# Altium PCB WDpcb1u20180124.PcbDoc
Units mm, origin at the board's own origin, x right, y up, seen from the top; angles counter-clockwise.
Board outline 85.1 x 72.58 mm, 2 copper layers (Top Layer, Bottom Layer); 25 components, 22 nets, 87 pads, 250 vias.
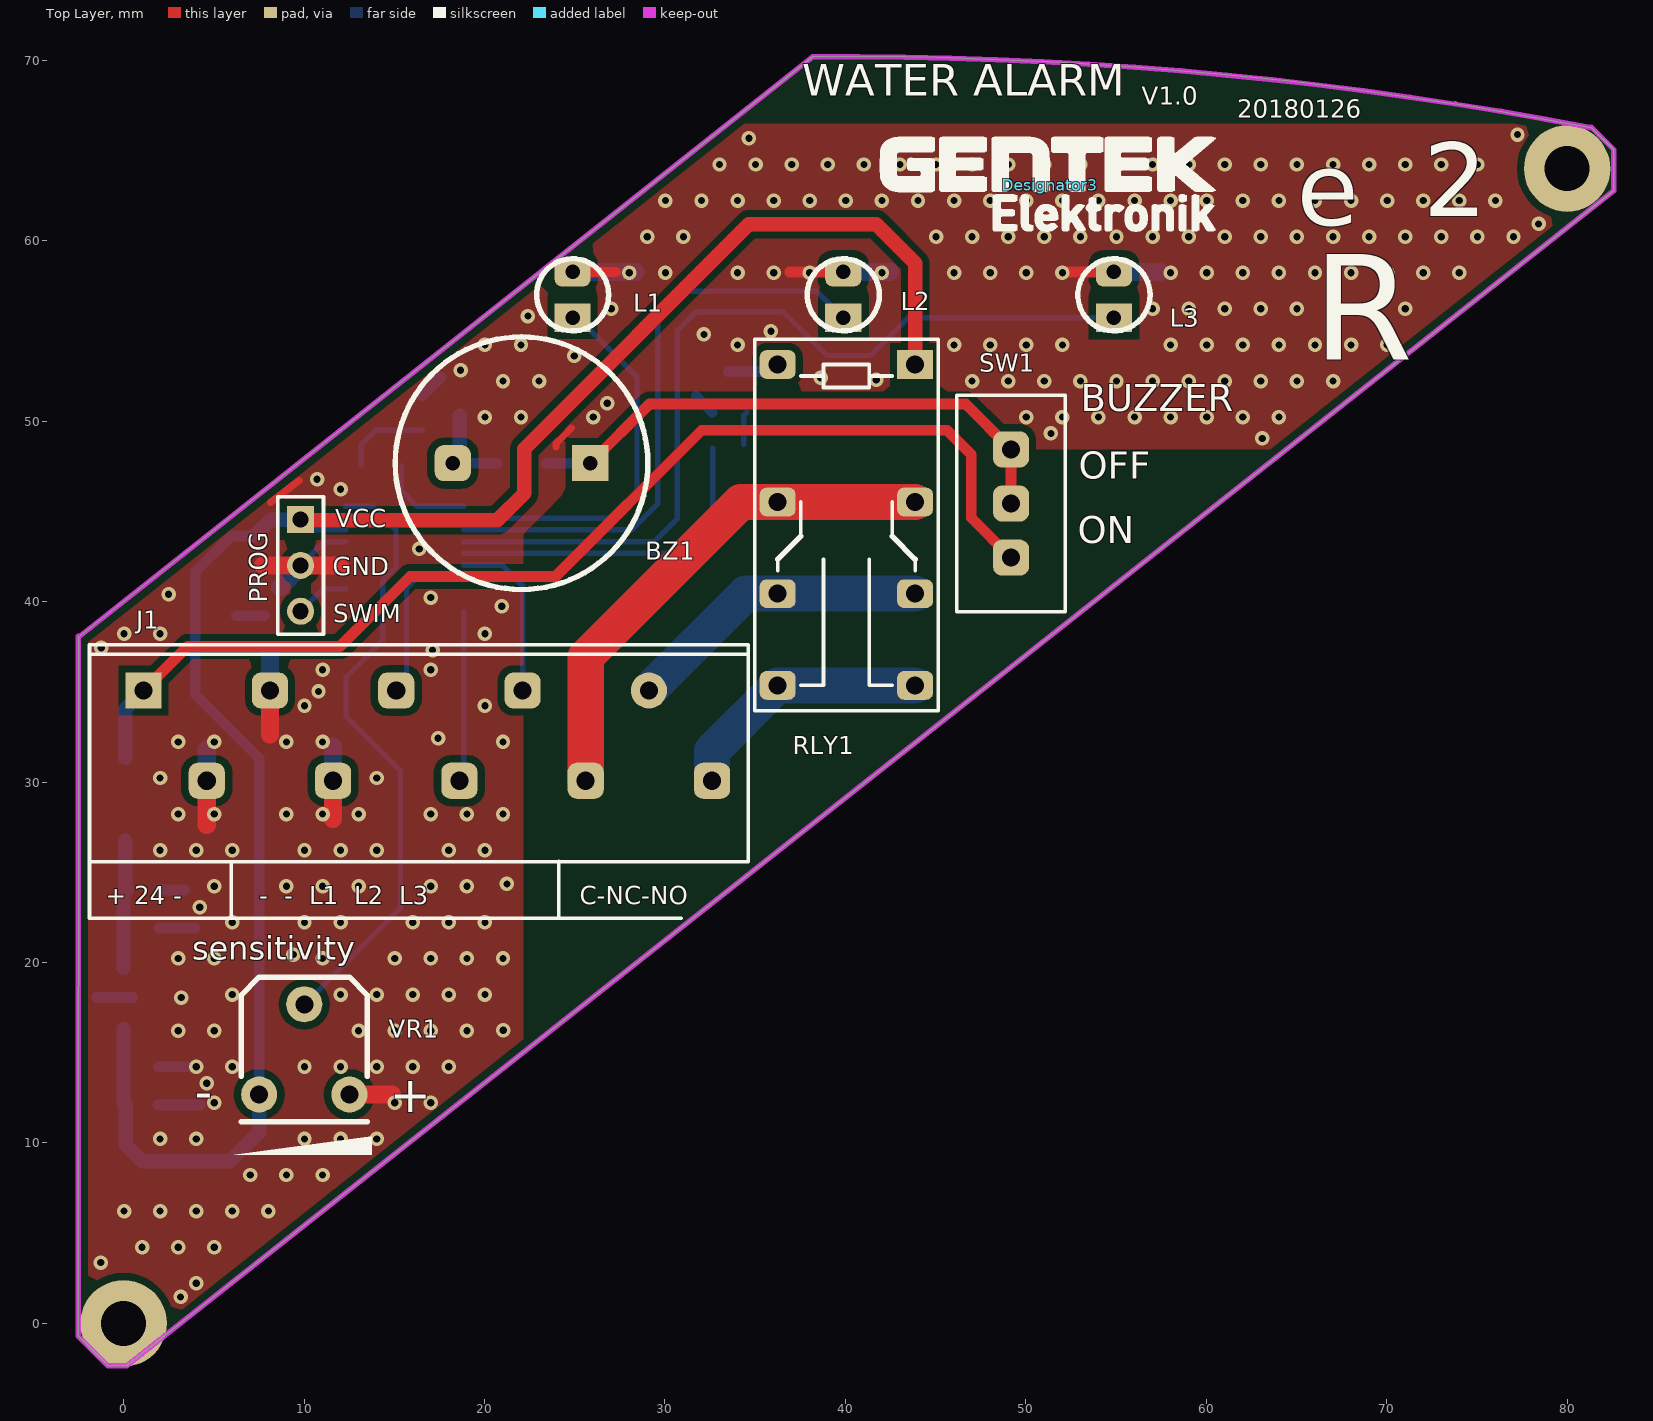
[diagram p0: Top Layer view]
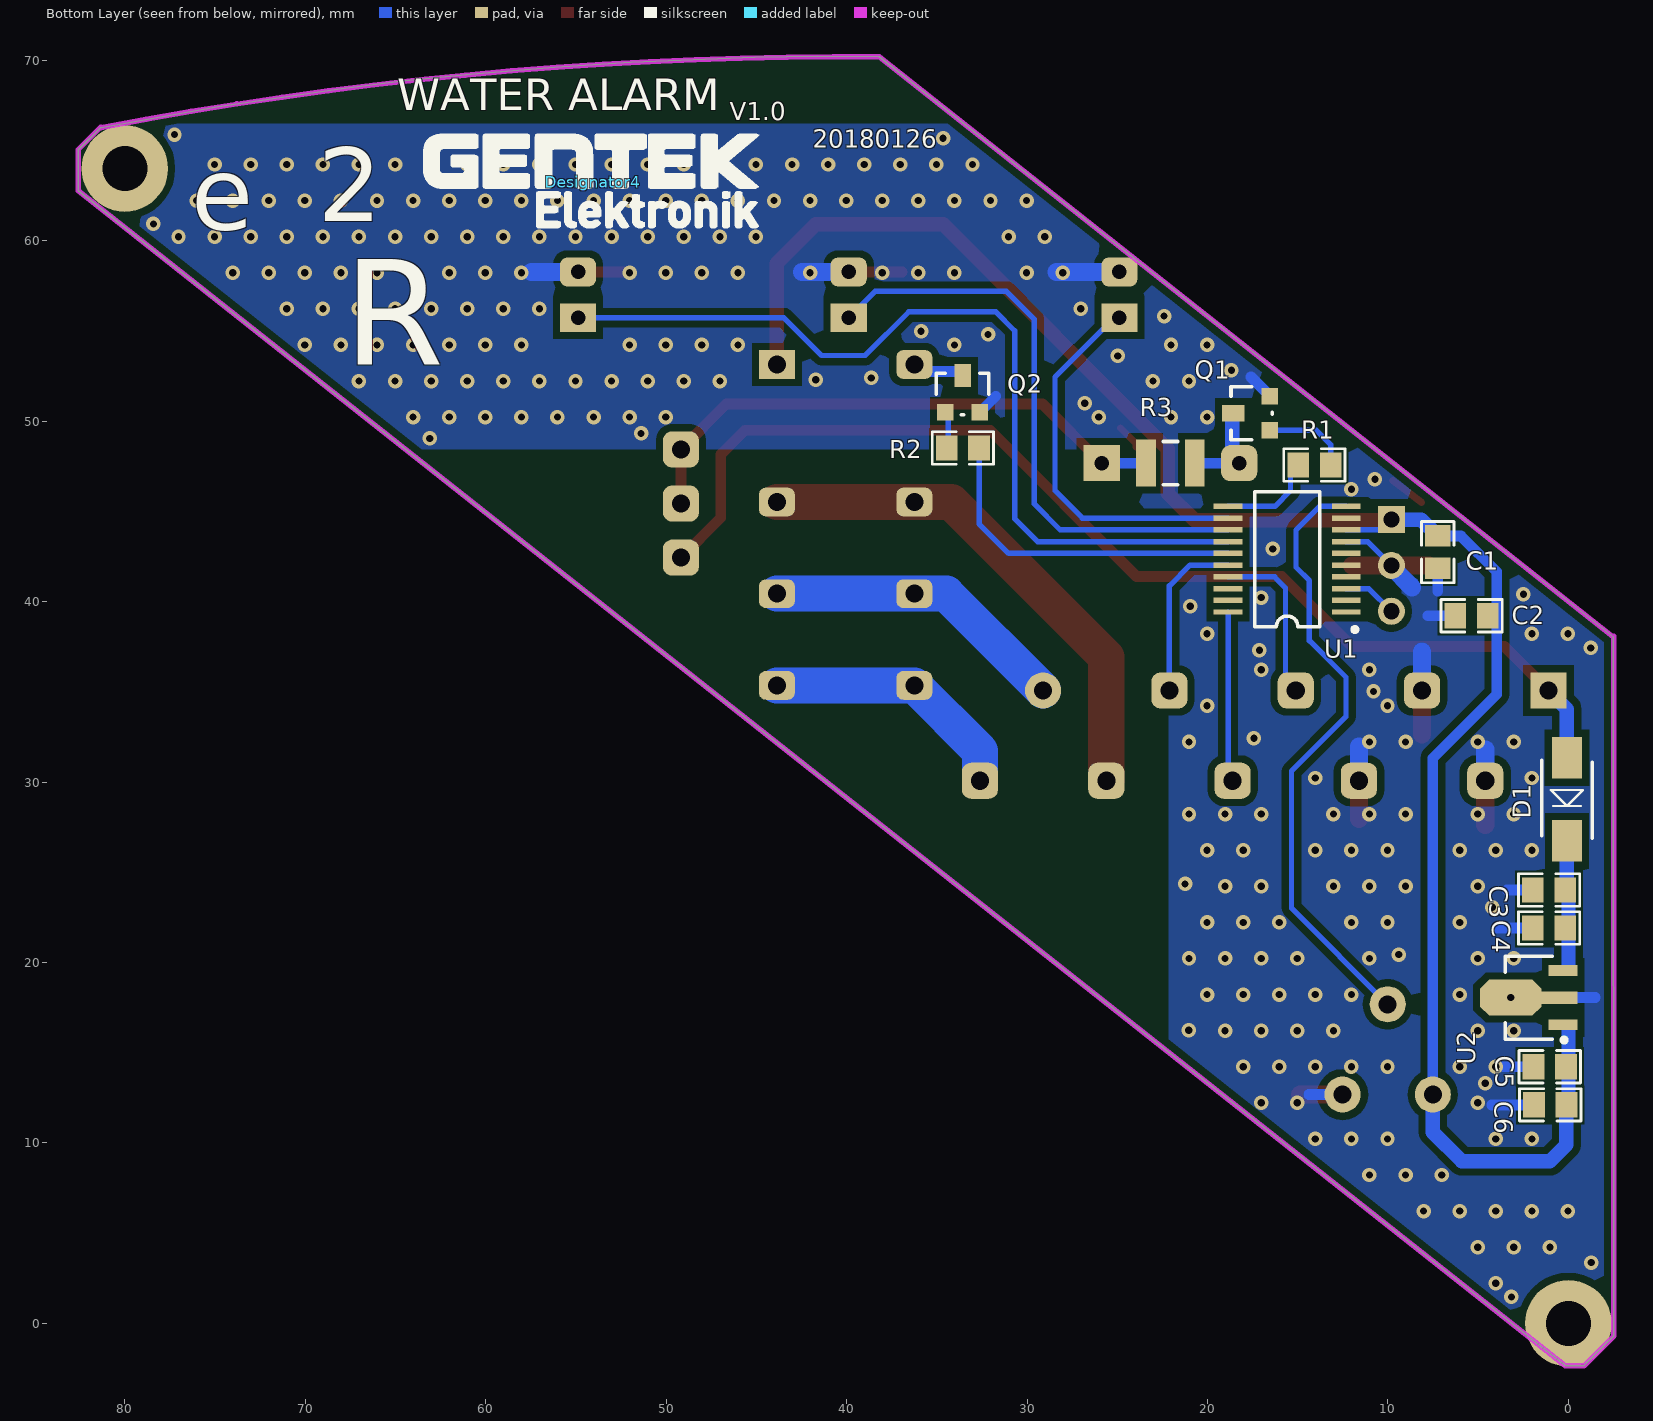
[diagram p1: Bottom Layer view, seen from below]

## Layer stack, top to bottom
Top Solder: solder mask 0.0102, Solder Resist, Dk 3.5
Top Layer: signal copper 0.0356
Dielectric 1: dielectric 0.32, FR-4, Dk 4.8
Bottom Layer: signal copper 0.0356
Bottom Solder: solder mask 0.0102, Solder Resist, Dk 3.5

## Board outline
-2.517,-0.692 -0.854,-2.355 0.165,-2.355 82.583,62.773 82.583,65.041 81.332,66.266 74.833,67.431 68.001,68.422 64.496,68.853 60.813,69.234 56.164,69.615 51.923,69.895 45.09,70.174 41.61,70.225 38.189,70.193 -2.494,38.04 -2.517,-0.692

## Design rules (kind name [scope] priority, off if disabled: settings)
Clearance [All] p1: gap=0.4 ignorepadtopadclearanceinfootprint=FALSE
DiffPairsRouting [All] p1: maxlimit=0.254 minlimit=0.254 mostfreqgap=0.254 toplayer_minwidth=0.381 toplayer_maxwidth=0.381 toplayer_prefwidth=0.381 bottomlayer_minwidth=0.381 bottomlayer_maxwidth=0.381 bottomlayer_prefwidth=0.381 substack1={59E6C3D2-A5CD-4B9F-BAEB-467B5BD1E1AA} toplayer_{59e6c3d2-a5cd-4b9f-baeb-467b5bd1e1aa}_minwidth=0.381 toplayer_{59e6c3d2-a5cd-4b9f-baeb-467b5bd1e1aa}_maxwidth=0.381 toplayer_{59e6c3d2-a5cd-4b9f-baeb-467b5bd1e1aa}_prefwidth=0.381 bottomlayer_{59e6c3d2-a5cd-4b9f-baeb-467b5bd1e1aa}_minwidth=0.381 bottomlayer_{59e6c3d2-a5cd-4b9f-baeb-467b5bd1e1aa}_maxwidth=0.381 bottomlayer_{59e6c3d2-a5cd-4b9f-baeb-467b5bd1e1aa}_prefwidth=0.381 substack2={6E349AA3-A2AC-46F5-B1A9-C29AA8AD77F6} toplayer_{6e349aa3-a2ac-46f5-b1a9-c29aa8ad77f6}_minwidth=0.381 toplayer_{6e349aa3-a2ac-46f5-b1a9-c29aa8ad77f6}_maxwidth=0.381 toplayer_{6e349aa3-a2ac-46f5-b1a9-c29aa8ad77f6}_prefwidth=0.381 bottomlayer_{6e349aa3-a2ac-46f5-b1a9-c29aa8ad77f6}_minwidth=0.381 bottomlayer_{6e349aa3-a2ac-46f5-b1a9-c29aa8ad77f6}_maxwidth=0.381 bottomlayer_{6e349aa3-a2ac-46f5-b1a9-c29aa8ad77f6}_prefwidth=0.381 maxuncoupledlength=12.7
PolygonConnect [All] p1: connectstyle=Relief reliefconductorwidth=0.254 reliefentries=4 polygonreliefangle="90 Angle" airgapwidth=0.254
RoutingVias [All] p1: holewidth=0.711 width=1.27 viastyle="Through Hole" minholewidth=0.711 minwidth=1.27 maxholewidth=0.711 maxwidth=1.27
SolderMaskExpansion [All] p1: expansion=0.102 istentingtop=FALSE
Width [All] p1: maxlimit=0.254 minlimit=0.254 preferedwidth=0.254 substack1={59E6C3D2-A5CD-4B9F-BAEB-467B5BD1E1AA} substack2={6E349AA3-A2AC-46F5-B1A9-C29AA8AD77F6}
29 further rules are at their usual default settings.

## Components (designator, comment, footprint, x,y, rotation, side; value= is the part's Value field where it differs from the comment)
BZ1 "Comment" "piezo buzzer" 22.052,47.67 r90 top
C1 "CAP110050456E" C0805-N 7.244,42.742 r270 bottom (schematic designator C55)
C2 "CAP110050456E" C0805-N 5.364,39.212 r0 bottom (schematic designator C55)
C3 "CAP110050456E" C0805-N 1.068,24.022 r180 bottom (schematic designator C55)
C4 "CAP110050456E" C0805-N 1.068,21.914 r180 bottom (schematic designator C55)
C5 "CAP110050456E" C0805-N 1.032,14.218 r180 bottom (schematic designator C55)
C6 "CAP110050456E" C0805-N 1.007,12.11 r180 bottom (schematic designator C55)
D1 "SMAJ33CA" DO-214AC(SMA) 0.081,29.052 r270 bottom (schematic designator D7)
Designator3 "Comment" "GENTRK ELEKTRONIK" 51.338,63.113 r0 top
Designator4 "Comment" "GENTRK ELEKTRONIK" 54.031,63.265 r180 bottom
J1 "Comment" "10 pin Terminal sping loaded" 1.108,35.073 r0 top
L1 "Comment" "led 3mm" 24.883,56.998 r270 top
L2 "Comment" "led 3mm" 39.883,56.998 r270 top
L3 "Comment" "led 3mm" 54.883,56.998 r270 top
PROG "Comment" HDR1X3 9.809,44.546 r270 top
Q1 "TRS0BC817001" SOT-23 17.556,50.438 r90 bottom (schematic designator Q3)
Q2 "TRS0BC817001" SOT-23 33.578,51.505 r180 bottom (schematic designator Q3)
R1 "CAP110050319E" C0805-N 14.077,47.568 r180 bottom (schematic designator C54)
R2 "CAP110050319E" C0805-N 33.558,48.508 r0 bottom (schematic designator C54)
R3 "Comment" C1210 22.052,47.67 r0 bottom
RLY1 "Comment" "relay 5v tetecom" 40.058,44.248 r180 top
SW1 "Comment" "Slide Switch" 49.179,45.435 r90 top
U1 "Comment" TSSOP20 12.308,39.423 r90 bottom
U2 "Comment" SOT89M 2.189,18.053 r0 bottom
VR1 "Comment" Potentiometer 10.013,15.183 r0 top

## Footprints (in the part's own frame and the unit in brackets; to place one, negate y for a bottom-side part, rotate by r counter-clockwise, add the part's x,y. Pads: shape width x height; smd on the part's side, far side on the other; paste and mask are expansions set on the pad)
"10 pin Terminal sping loaded" [mm] "degson"
  rect 2x2 hole 1: 1(0,0)
  rrect50% 2x2 hole 1: 2(3.5,-5) 3(7,0) 4(10.5,-5) 5(14,0) 6(17.5,-5) 7(21,0) 8(24.5,-5) 10(31.5,-5)
  round 2 hole 1: 9(28,0)
  silkscreen extent -3,-9.5 33.5,2.54
C0805-N [mm] "Chip Resistor, Body 2.0x1.3mm, IPC Medium Density"
  rect 1.2x1.4 smd: 1(-0.9,0) 2(0.9,0)
  silkscreen extent -1.7,-0.9 1.7,0.9, body extent -1.07,-0.7 1.07,0.7, height 1.55
C1210 [mm] "Chip Capacitor, Body 3.2x2.5mm, IPC High Density"
  rect 1.1x2.6 smd: 1(-1.35,0) 2(1.35,0)
  silkscreen extent -0.4,-1.2 0.4,1.2, body extent -1.7,-1.35 1.7,1.35, height 1.3
DO-214AC(SMA) [mm]
  rect 2.3x1.68 smd: A(-2.3,0) K(2.3,0)
  silkscreen extent -2.16,-1.4 2.16,1.4
"GENTRK ELEKTRONIK" [mm]
  silkscreen extent -9.43,-2.58 9.2,2.64, body extent -9.43,-2.59 9.2,2.65, height 3
HDR1X3 [mm] "Connector; Header; 3 Position"
  rect 1.5x1.5 hole 0.9: 1(0,0)
  round 1.5 hole 0.9: 2(2.54,0) 3(5.08,0)
  silkscreen extent -1.27,-1.27 6.35,1.27
"led 3mm" [mm]
  rrect50% 1.6x2 hole 0.8: 1(-1.27,0)
  rect 1.6x2 hole 0.8: 2(1.27,0)
  silkscreen extent -2,-2 2,2
"piezo buzzer" [mm]
  rect 2x2 hole 0.8: 1(0,-3.81)
  rrect50% 2x2 hole 0.8: 2(0,3.81)
  silkscreen extent -7,-7 7,7
Potentiometer [mm]
  round 2 hole 1: 1(-2.5,-2.5) 2(2.5,-2.5) 3(0,2.5)
  silkscreen extent -3.5,-4 3.5,4
"relay 5v tetecom" [mm]
  rrect50% 2x1.6 hole 1: 1(3.81,-8.89) 4(3.81,-1.27) 6(3.81,3.81) 8(3.81,8.89) 9(-3.81,8.89) 11(-3.81,3.81) 13(-3.81,-1.27)
  rect 2x1.6 hole 1: 16(-3.81,-8.89)
  silkscreen extent -5.08,-10.3 5.08,10.3
"Slide Switch" [mm]
  rrect50% 2x2 hole 1: 1(-3,0) 2(0,0) 3(3,0)
  silkscreen extent -6,-3 6,3
SOT89M [mm] "SOT89, 3-Leads, Body 4.5x2.4 mm, Pitch 1.5mm, Lead Span 4.1mm, IPC Low Density"
  rect 1.6x0.6 smd: 1(-1.9,1.5) 3(-1.9,-1.5)
  rect 2x0.7 smd: 2(-1.7,0)
  oct 3.4x2 smd: 2(1,0)
  silkscreen extent -2.07,-2.3 1.3,2.47, body extent -1.3,-2.3 1.3,2.3, height 1.6
SOT-23 [mil]
  rect 36x36 smd: 1(-37.5,-40) 2(37.5,-40)
  rect 36x50 smd: 3(0.5,40)
  silkscreen extent -58,-45 58,45, body extent -60,-48 60,48, height 43
TSSOP20 [mm] "SO20 - 20 Leads; Body Width 7.5 mm; Pitch 1.27 mm"
  rect 0.3x1.6 smd: GND(3.9,0) NRST(1.95,0) PA2(2.6,0) PA3(3.25,0) PB0(5.85,0) PB1(5.85,6.55) PB2(5.2,6.55) PB3(4.55,6.55) PB4(3.9,6.55) PB5(3.25,6.55) PB6(2.6,6.55) PB7(1.95,6.55) PC4(0,6.55) PC5(0,0) PC6(0.65,0) PD0(5.2,0) SCL(0.65,6.55) SDA(1.3,6.55) SWIM(1.3,0) VCC(4.55,0)
  silkscreen extent -1.1,-0.6 6.67,5.07, body extent -0.39,0 6.2,6.5, height 1.4

## Part data
C1 C2 C3 C4 C5 C6: "CAP.0805 10uF 16V 10% X5R SAMSUNG"
D1: "DIODE TVS 400W 33V DO214AC SMA"
Q1 Q2: "TRANSISTOR NPN 0.5A 45V SOT23 NXP"
R1 R2: "CAP.0805 10uF 25V 10% X5R"

## Free pads (board coordinates)
  round 4.8 hole 2.5: 0(0,0) 0(80,64)

## Via types
v1: diameter 0.8, hole 0.4, Top Layer to Bottom Layer, tented both sides, 250 vias

## Nets (pads, with @x,y where several pads share a name; then routed paths per layer and width w, separated by ;. In a path a pad name is that pad's centre, name@x,y a point inside that pad or via, vN(x,y) a via of type N, cw(c..) or ccw(c..) an arc to the next point about the centre after c; other vN are vias at no path point)
3V3: C1.1 C2.1 C5.2 C6.2 PROG.1 RLY1.16 U1.VCC U2.1 VR1.1 | length 105.8
  Top Layer w0.8: PROG.1@9.809,44.501 20.712,44.501 22.205,45.993 22.205,48.457 34.651,60.903 41.712,60.903 43.868,58.747 RLY1.16
  Bottom Layer w0.3: PROG.1@9.573,43.973 U1.VCC
  Bottom Layer w0.6: C1.1 5.96,43.642 3.967,41.65 3.967,34.868 7.513,31.323 VR1.1
  Bottom Layer w0.8: C6.2@-0.008,12.224 U2.1@-0.008,16.299 ; C6.2 0.107,9.9 1.021,8.986 5.898,8.986 7.513,10.6 VR1.1 ; C1.1 8.147,44.546 PROG.1
GND: C1.2 C2.2 C3.1 C4.1 C5.1 C6.1 J1.2 J1.3 J1.4 L1.1 L2.1 L3.1 PROG.2 Q1.2 Q2.2 U1.GND U2.2 VR1.2 | length 61.3
  Top Layer w0.4: 8.133,45.485 9.733,46.705 ; 23.957,48.584 23.957,48.762 24.821,49.626
  Top Layer w0.6: L1.1 27.266,58.268 ; 36.918,58.268 L2.1 ; v1@51.942,58.268 L3.1
  Top Layer w1: 4.608,27.609 J1.2 ; 7.727,42.006 PROG.2 11.994,42.006 ; 8.108,32.633 J1.3 ; 11.608,27.955 J1.4 ; VR1.2 14.879,12.683
  Bottom Layer w0.3: PROG.2 11.127,43.323 U1.GND
  Bottom Layer w0.6: -1.494,18.053 U2.2@0.489,18.053 ; C6.1 4.247,12.11 ; C5.1 3.586,14.218 ; C4.1 3.967,21.914 ; C3.1 3.383,24.022 ; C2.2 7.777,39.212 ; 7.244,40.583 C1.2 ; VR1.2 14.392,12.683 ; Q1.2 17.594,52.445 ; 31.73,51.385 Q2.2
  Bottom Layer w1: J1.2 4.608,31.8 ; J1.3 8.108,37.23 ; 8.666,40.786 9.809,41.929 PROG.2 ; J1.4 11.608,31.977 ; L1.1 v1@28.358,58.268 ; L2.1 42.48,58.268 ; L3.1 57.453,58.268
  other v1: 3.155,1.467 4.023,2.223 -1.265,3.372 1.023,4.223 3.023,4.223 5.023,4.223 0.023,6.223 2.023,6.223 4.023,6.223 6.023,6.223 8.023,6.223 7.023,8.223 9.023,8.223 11.023,8.223 2.023,10.223 4.023,10.223 10.023,10.223 12.023,10.223 14.023,10.223 5.023,12.223 15.023,12.223 17.023,12.223 4.602,13.304 4.023,14.223 6.023,14.223 10.023,14.223 12.023,14.223 14.023,14.223 16.023,14.223 18.023,14.223 3.023,16.223 5.023,16.223 13.023,16.223 15.023,16.223 17.023,16.223 19.023,16.223 21.036,16.25 3.189,18.053 6.023,18.223 12.023,18.223 14.023,18.223 16.023,18.223 18.023,18.223 20.023,18.223 3.023,20.223 5.023,20.223 11.023,20.223 15.023,20.223 17.023,20.223 19.023,20.223 21.023,20.223 9.403,20.441 6.023,22.223 10.023,22.223 12.023,22.223 16.023,22.223 18.023,22.223 20.023,22.223 4.221,23.057 5.023,24.223 9.023,24.223 11.023,24.223 13.023,24.223 17.023,24.223 19.023,24.223 21.239,24.353 2.023,26.223 4.023,26.223 6.023,26.223 10.023,26.223 12.023,26.223 14.023,26.223 18.023,26.223 20.023,26.223 3.023,28.223 5.023,28.223 9.023,28.223 11.023,28.223 13.023,28.223 17.023,28.223 19.023,28.223 21.023,28.223 2.023,30.223 14.023,30.223 3.023,32.223 5.023,32.223 9.023,32.223 11.023,32.223 21.023,32.223 17.429,32.43 10.023,34.223 20.023,34.223 10.8,35.021 11.023,36.223 17.023,36.223 17.125,37.307 -1.24,37.434 0.023,38.223 2.023,38.223 20.023,38.223 20.96,39.745 17.023,40.223 2.494,40.405 16.388,42.92 12.023,46.223 10.724,46.781 63.099,49.041 51.389,49.321 20.023,50.223 22.023,50.223 26.023,50.223 50.023,50.223 52.023,50.223 54.023,50.223 56.023,50.223 58.023,50.223 60.023,50.223 62.023,50.223 64.023,50.223 26.802,50.997 21.023,52.223 23.023,52.223 47.023,52.223 49.023,52.223 51.023,52.223 53.023,52.223 55.023,52.223 57.023,52.223 59.023,52.223 61.023,52.223 63.023,52.223 65.023,52.223 67.023,52.223 41.712,52.293 38.638,52.394 18.674,52.826 24.973,53.613 20.023,54.223 22.023,54.223 34.023,54.223 46.023,54.223 48.023,54.223 50.023,54.223 52.023,54.223 58.023,54.223 60.023,54.223 62.023,54.223 64.023,54.223 66.023,54.223 68.023,54.223 70.023,54.223 32.161,54.807 35.87,54.985 22.408,55.823 27.023,56.223 57.023,56.223 59.023,56.223 61.023,56.223 63.023,56.223 65.023,56.223 67.023,56.223 69.023,56.223 71.023,56.223 28.023,58.223 30.023,58.223 34.023,58.223 36.023,58.223 38.023,58.223 42.023,58.223 46.023,58.223 48.023,58.223 50.023,58.223 52.023,58.223 58.023,58.223 60.023,58.223 62.023,58.223 64.023,58.223 66.023,58.223 68.023,58.223 70.023,58.223 72.023,58.223 74.023,58.223 29.023,60.223 31.023,60.223 45.023,60.223 47.023,60.223 49.023,60.223 51.023,60.223 53.023,60.223 55.023,60.223 57.023,60.223 59.023,60.223 61.023,60.223 63.023,60.223 65.023,60.223 67.023,60.223 69.023,60.223 71.023,60.223 73.023,60.223 75.023,60.223 77.023,60.223 78.415,60.929 30.023,62.223 32.023,62.223 34.023,62.223 36.023,62.223 38.023,62.223 40.023,62.223 42.023,62.223 44.023,62.223 46.023,62.223 48.023,62.223 50.023,62.223 52.023,62.223 54.023,62.223 56.023,62.223 58.023,62.223 60.023,62.223 62.023,62.223 64.023,62.223 66.023,62.223 68.023,62.223 70.023,62.223 72.023,62.223 74.023,62.223 76.023,62.223 33.023,64.223 35.023,64.223 37.023,64.223 39.023,64.223 41.023,64.223 43.023,64.223 45.023,64.223 47.023,64.223 49.023,64.223 51.023,64.223 53.023,64.223 55.023,64.223 57.023,64.223 59.023,64.223 61.023,64.223 63.023,64.223 65.023,64.223 67.023,64.223 69.023,64.223 71.023,64.223 73.023,64.223 75.023,64.223 34.651,65.678 77.246,65.882
"IN 24V": D1.A J1.1 SW1.1 | length 63.2
  Top Layer w0.6: J1.1 3.545,37.51 11.994,37.51 15.88,41.396 23.932,41.396 32.034,49.499 45.623,49.499 46.97,48.152 46.97,44.644 SW1.1
  Bottom Layer w0.8: D1.A 0.081,34.046 J1.1
NewNet3: U1.PB0 VR1.3 | length 34.2
  Bottom Layer w0.3: VR1.3 15.347,23.017 15.347,30.601 12.324,33.624 12.324,35.808 14.356,37.84 14.356,41.167 15.093,41.904 15.093,43.961 13.781,45.273 U1.PB0
NewNet4: L1.2 U1.PB2 | length 21.5
  Bottom Layer w0.3: U1.PB2 26.93,44.623 28.453,46.146 28.453,52.445 25.17,55.728 L1.2
NewNet5: L3.2 U1.PB4 | length 49.3
  Bottom Layer w0.3: U1.PB4 29.415,43.323 30.688,44.596 30.688,55.01 31.73,56.052 36.556,56.052 38.969,53.639 41.382,53.639 43.471,55.728 L3.2
NewNet6: L2.2 U1.PB3 | length 33.1
  Bottom Layer w0.3: U1.PB3 28.16,43.973 29.596,45.409 29.596,55.645 31.145,57.195 37.936,57.195 38.416,57.195 L2.2
NewNet8: BZ1.1 R3.2 SW1.2 SW1.3 | length 31.7
  Top Layer w0.6: BZ1.1 29.139,50.946 46.668,50.946 SW1.3 SW1.2 SW1.2@48.646,45.435
  Bottom Layer w0.6: R3.2 BZ1.1
NewNet9: BZ1.2 Q1.3 R3.1 | length 6.1
  Bottom Layer w0.3: BZ1.2 BZ1.2@18.858,47.054
  Bottom Layer w0.6: BZ1.2 R3.1
  Bottom Layer w0.8: BZ1.2 18.636,48.063 Q1.3@18.636,50.311
NewNet10: J1.10 RLY1.8 RLY1.9 | length 14.4
  Bottom Layer w2: J1.10 32.608,31.718 RLY1.8 RLY1.9
NewNet11: J1.9 RLY1.6 RLY1.11 | length 17
  Bottom Layer w2: J1.9 34.473,40.438 RLY1.6 RLY1.11
NewNet12: J1.8 RLY1.4 RLY1.13 | length 28.7
  Top Layer w2: J1.8 25.608,36.925 34.201,45.518 RLY1.4 RLY1.13
NewNet13: Q2.3 RLY1.1 | length 3.7
  Bottom Layer w0.6: Q2.3@33.508,52.75 36.636,52.75 RLY1.1
NewNet14: J1.5 U1.PB7 | length 9.4
  Bottom Layer w0.3: J1.5 15.677,35.642 15.677,40.767 16.283,41.373 U1.PB7
NewNet15: J1.7 U1.PB6 | length 9.5
  Bottom Layer w0.3: U1.PB6 20.958,42.023 22.108,40.873 J1.7
NewNet16: J1.6 U1.PC4 | length 9.5
  Bottom Layer w0.3: J1.6 18.858,30.323 U1.PC4
NewNet17: PROG.3 U1.SWIM | length 3
  Bottom Layer w0.3: PROG.3 11.067,40.723 U1.SWIM
NewNet18: C3.2 C4.2 D1.K U2.3 | length 6.9
  Bottom Layer w0.8: U2.3@-0.018,19.716 U2.3@-0.008,19.706 ; -0.008,19.858 -0.008,23.846 C3.2 ; C3.2@0.081,24.11 D1.K
NewNet19: Q1.1 R1.2 | length 4.8
  Bottom Layer w0.3: R1.2 13.177,48.7 13.962,49.486 Q1.1
NewNet20: R1.1 U1.PB1 | length 5.2
  Bottom Layer w0.3: R1.1@15.397,47.543 15.397,46.146 16.27,45.273 U1.PB1
NewNet21: Q2.1 R2.2 | length 1.8
  Bottom Layer w0.3: R2.2@34.358,48.711 34.358,50.317 Q2.1
NewNet22: R2.1 U1.PB5 | length 18.7
  Bottom Layer w0.3: U1.PB5 31.025,42.673 32.658,44.306 R2.1
pads on no net: U1.NRST U1.PA2 U1.PA3 U1.PC5 U1.PC6 U1.PD0 U1.SCL U1.SDA

## Polygon pours and split planes (outlines as drawn)
GND on Top Layer "Bottom Layer-No Net" (solid, pour order 4): -2.564,-0.729 -2.564,38.031 33.486,66.472 80.037,66.472 80.044,66.479 cw(c80.044,64.026) 81.778,65.761 82.536,65.003 82.536,63.474 cw(c80.966,63.474) 82.076,62.364 64.448,48.443 26.854,48.443 23.3,44.889 22.151,43.74 22.151,15.019 0.165,-2.355 -0.901,-2.392
GND on Bottom Layer "Bottom Layer-No Net" (solid, pour order 3): -2.564,-0.729 -2.564,38.031 33.486,66.472 80.037,66.472 80.044,66.479 cw(c80.044,64.026) 81.778,65.761 82.536,65.003 82.536,63.474 cw(c80.966,63.474) 82.076,62.364 64.448,48.443 26.854,48.443 23.3,44.889 22.151,43.74 22.151,15.019 0.165,-2.355 -0.901,-2.392

## Keep-outs
Keep-Out Layer:
  lines w0.3: -2.517,38.069 -2.517,-0.692 -0.854,-2.355 0.165,-2.355 82.583,62.773 82.583,65.041 81.336,66.288 ; -2.494,38.04 38.189,70.189 ; 38.189,70.193 cw(c40,-148.9) 81.332,66.266

## Silkscreen, mask and mechanical layers (free items; w line width, h text height)
Top Overlay:
  region: 13.746,10.357 13.746,9.341 6.126,9.341
  lines w0.2: -1.892,25.573 -1.892,22.448 30.891,22.448 ; 5.974,22.448 5.974,25.573 ; 24.11,22.472 24.11,25.597
  text "V1.0" at 56.418,67.533 h1
  text "WATER ALARM" at 37.597,67.456 h3
  text "20180126" at 61.702,66.821 h1
  text "2" at 72.014,60.014 h7
  text "e" at 65.004,59.532 h7
  text "R" at 65.893,51.48 h10
  text "BUZZER" at 53.04,50.54 h1.5
  text "OFF" at 52.939,46.806 h1.5
  text "VCC" at 11.74,44.114 h1
  text "ON" at 52.888,43.225 h1.5
  text "GND" at 11.587,41.447 h1
  text "SWIM" at 11.613,38.856 h1
  text "+ 24 -" at -0.977,23.223 h1
  text "-  -  L1  L2  L3" at 7.523,23.223 h1
  text "C-NC-NO" at 25.273,23.223 h1
  text "sensitivity" at 3.815,20.162 h1.3
  text "-" at 3.942,11.856 h2
  text "+" at 14.737,11.703 h2
Bottom Overlay:
  text "V1.0" at 46.487,66.669 h1
  text "WATER ALARM" at 64.902,66.644 h3
  text "20180126" at 41.864,65.145 h1
  text "2" at 69.296,59.76 h7
  text "e" at 76.307,59.278 h7
  text "R" at 67.874,51.226 h10